# Altium PCB Placa_Sencilla.PcbDoc
Units mm, origin at the board's own origin, x right, y up, seen from the top; angles counter-clockwise.
Board outline 48 x 48 mm, 2 copper layers (Top Layer, Bottom Layer); 51 components, 48 nets, 205 pads, 0 vias.
Unrouted connection lines stored in the file: 141.
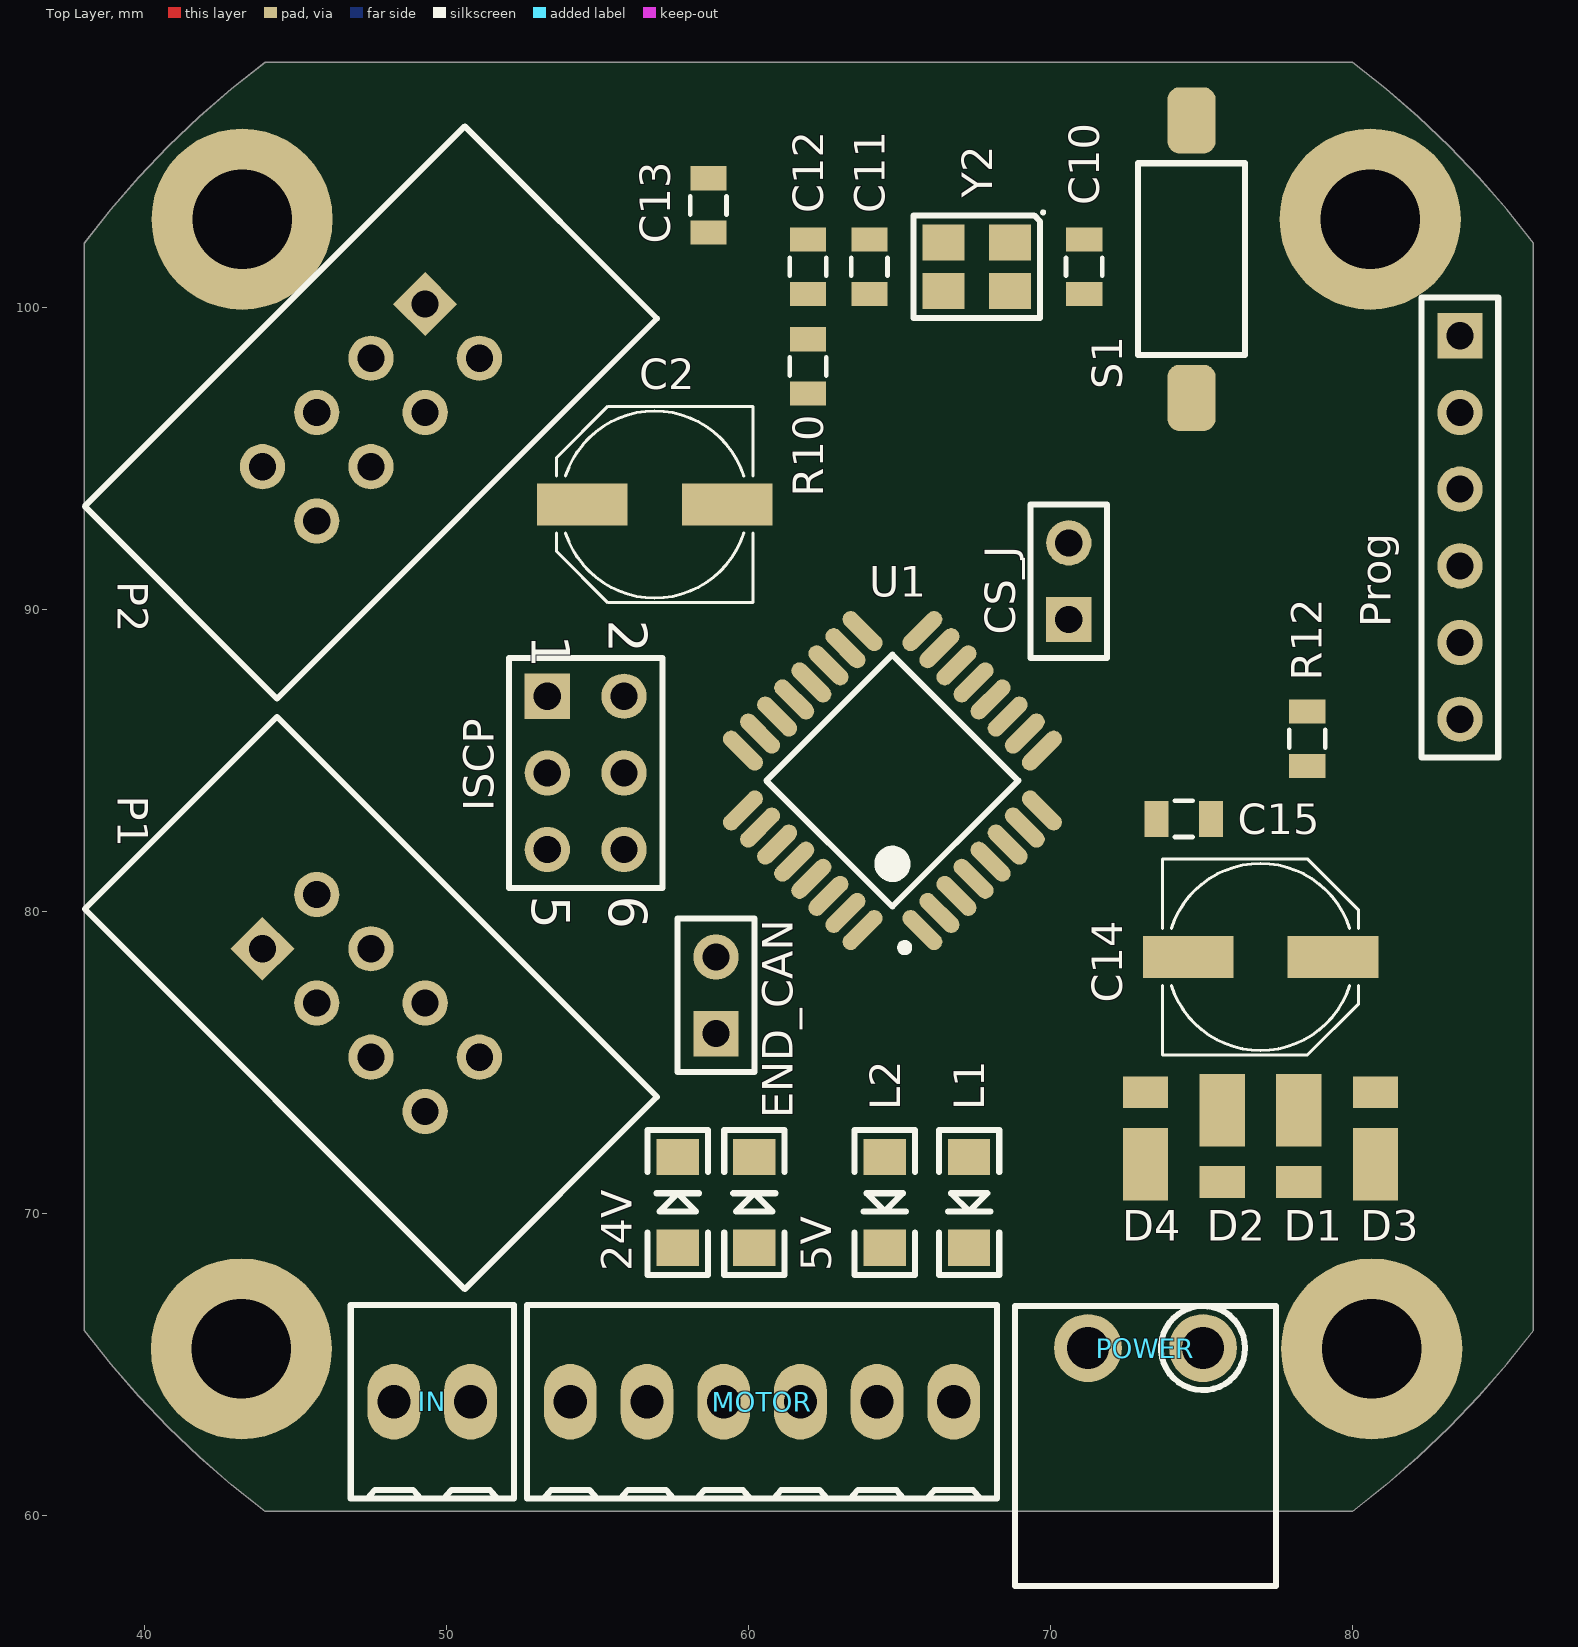
[diagram p0: Top Layer view]
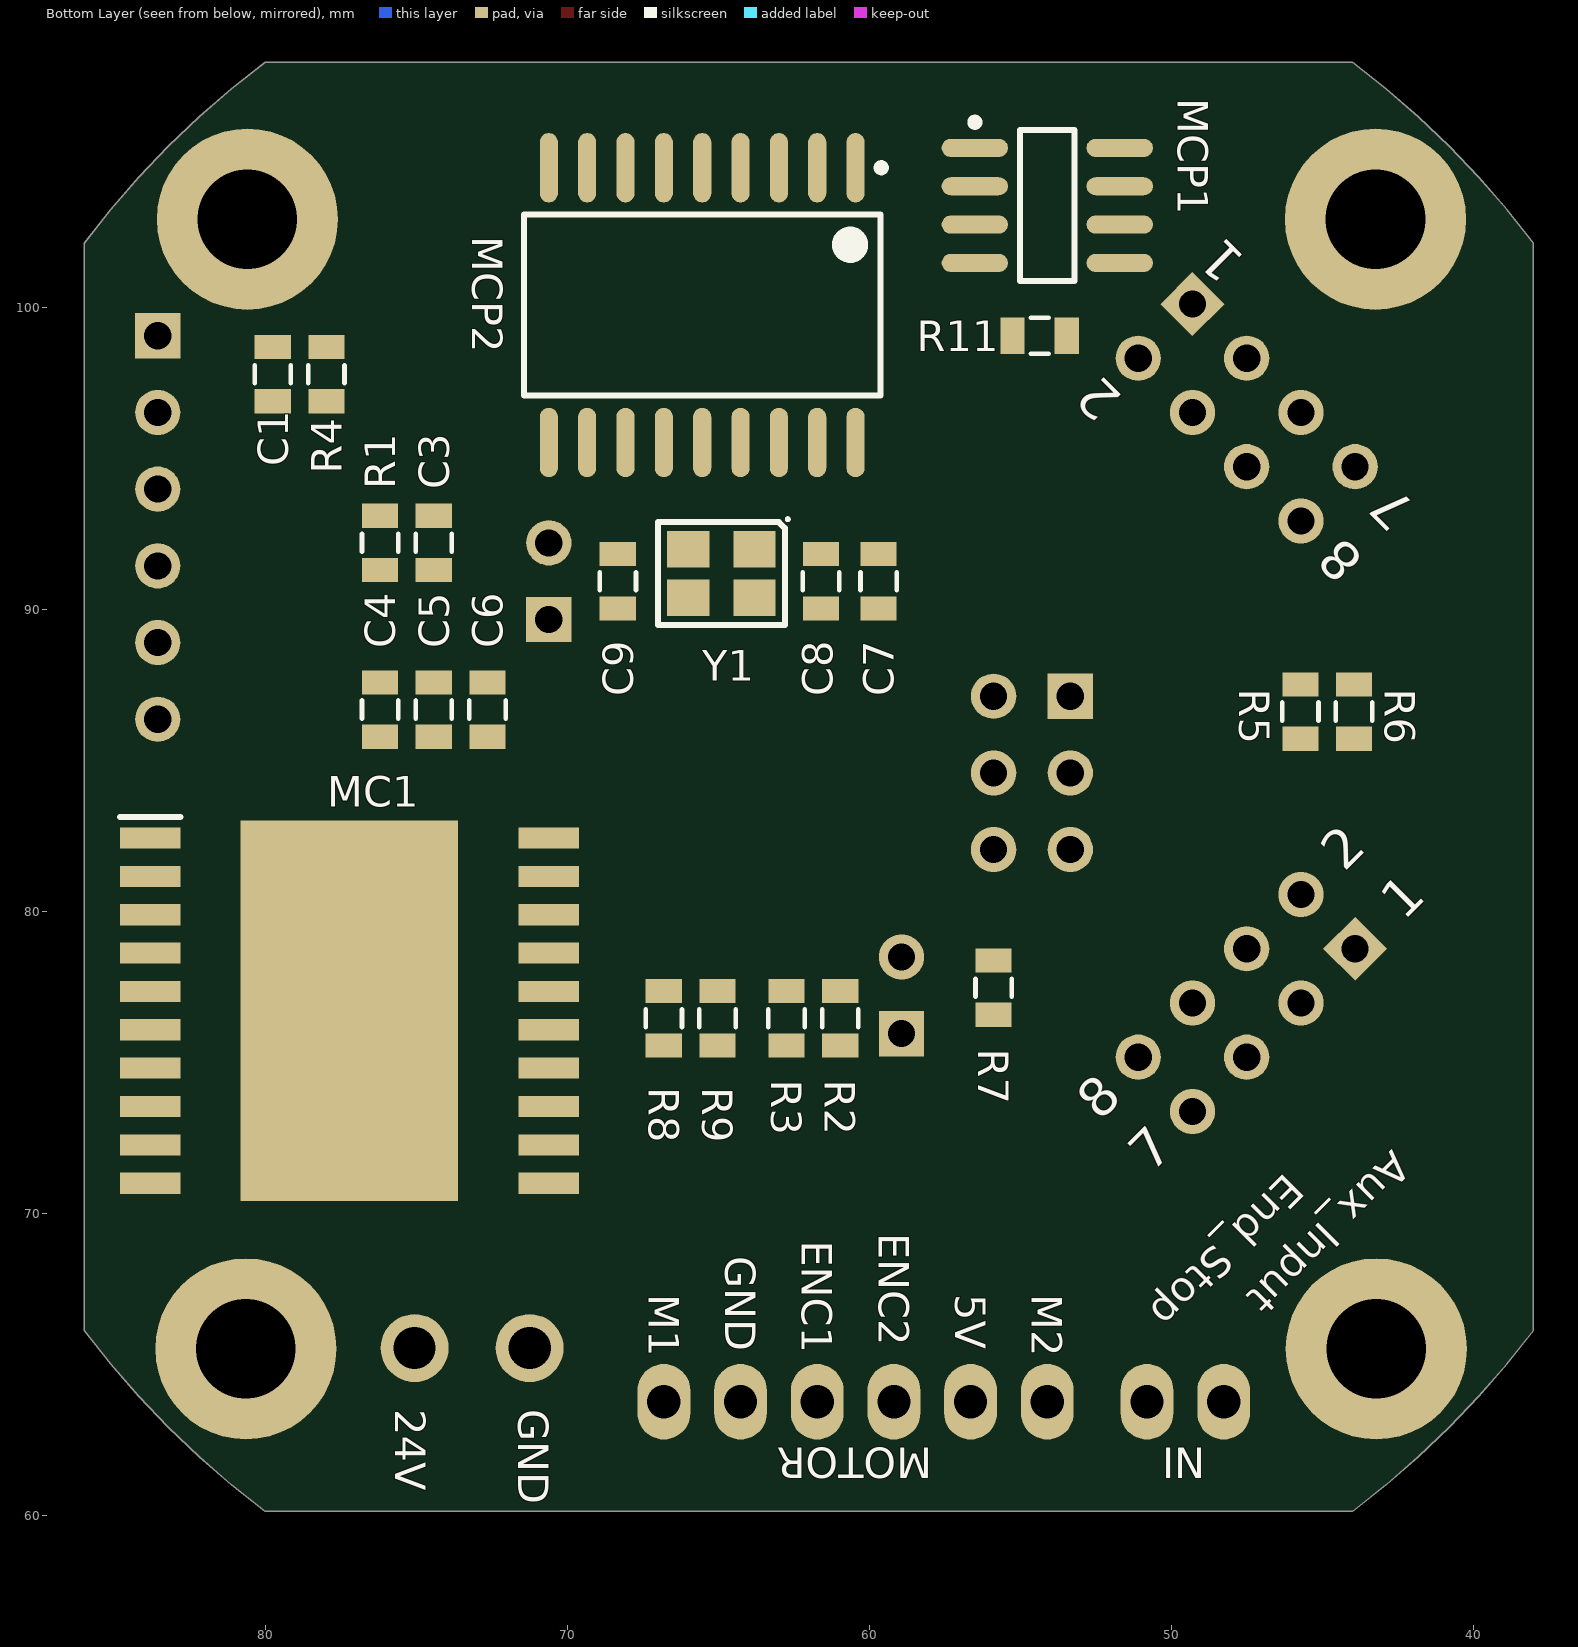
[diagram p1: Bottom Layer view, seen from below]

## Layer stack, top to bottom
Top Solder: solder mask 0.0102, Solder Resist, Dk 3.5
Top Layer: signal copper 0.0356
Dielectric 1: dielectric 0.32, FR-4, Dk 4.8
Bottom Layer: signal copper 0.0356
Bottom Solder: solder mask 0.0102, Solder Resist, Dk 3.5

## Board outline
40.788,62.908 39.809,63.934 38.88,65.004 38.001,66.119 38.001,102.125 38.88,103.239 39.809,104.309 40.788,105.335 41.813,106.313 42.884,107.243 43.998,108.122 80.004,108.122 81.118,107.243 82.189,106.313 83.214,105.335 84.192,104.309 85.122,103.239 86.001,102.125 86.001,66.119 85.122,65.004 84.192,63.934 83.214,62.908 82.189,61.93 81.118,61 80.004,60.122 43.998,60.122 42.884,61 41.813,61.93

## Design rules (kind name [scope] priority, off if disabled: settings)
BoardOutlineClearance [All] p1: gap=1 ignorepadtopadclearanceinfootprint=FALSE except(0: Arc-SplitContinuation Track-SplitContinuation SMDPad-SplitContinuation THPad-SplitContinuation Via-SplitContinuation Fill-SplitContinuation Poly-SplitContinuation Region-SplitContinuation Text-SplitContinuation)
Clearance Clearance_2 [InNamedPolygon('GND TOP PLANE')] p1: gap=0.254 ignorepadtopadclearanceinfootprint=FALSE except(0: Arc-Hole Track-Hole SMDPad-Hole THPad-Hole Via-Hole Fill-Hole Poly-Hole Region-Hole Text-Hole)
Clearance Clearance_1 [InNamedPolygon('GND BOTTOM PLANE')] p2: gap=0.254 ignorepadtopadclearanceinfootprint=FALSE except(0: Arc-Hole Track-Hole SMDPad-Hole THPad-Hole Via-Hole Fill-Hole Poly-Hole Region-Hole Text-Hole)
Clearance [All] p3: gap=0.152 ignorepadtopadclearanceinfootprint=FALSE
Clearance Clearance_POWER [InNet('24V') vs InNet('PGND')] p4: gap=0.381 ignorepadtopadclearanceinfootprint=FALSE
HoleSize [All] p1: absolutevalues=TRUE maxlimit=6.3 minlimit=0.3 maxpercent=80.000 minpercent=20.000
PlaneClearance [All] p1: clearance=5.016
PolygonConnect [All] p1: connectstyle=Relief reliefconductorwidth=0.254 reliefentries=4 polygonreliefangle="90 Angle" airgapwidth=0.254
RoomDefinition Placa_Motor_Esquematico [InComponentClass('Placa_Motor_Esquematico')] p1: confinementstyle=ConfineOut formatcopy=TRUE lockcomponents=FALSE outline 260.731,135.89 261.112,135.509 261.112,130.048 264.541,130.048 265.176,130.683 265.176,134.874 264.16,135.89 264.287,136.017 264.287,139.446
RoutingVias RoutingVias_24V [InNet('24V')] p1: holewidth=0.5 width=0.8 viastyle="Through Hole" minholewidth=0.3 minwidth=0.6 maxholewidth=1 maxwidth=1.2
RoutingVias RoutingVias_PGND [InNet('PGND')] p2: holewidth=0.4 width=0.7 viastyle="Through Hole" minholewidth=0.3 minwidth=0.6 maxholewidth=1 maxwidth=1.2
RoutingVias [All] p3: holewidth=0.3 width=0.5 viastyle="Through Hole" minholewidth=0.3 minwidth=0.6 maxholewidth=1 maxwidth=1.2
SMDNeckDown [All] p1: percent=100.000
SilkToSilkClearance [All] p1 off: silktosilkclearance=0.127
SolderMaskExpansion [All] p1: expansion=0.102
Width Width_Motor1 [InNet('MOTOR1')] p1: maxlimit=0.889 minlimit=0.381 preferedwidth=0.889
Width Width_Motor2 [InNet('MOTOR2')] p2: maxlimit=0.889 minlimit=0.381 preferedwidth=0.889
Width Width_24V [InNet('24V')] p3: maxlimit=0.889 minlimit=0.381 preferedwidth=0.889
Width Width_PGND [InNet('PGND')] p4: maxlimit=0.889 minlimit=0.381 preferedwidth=0.889
Width Width_VCC [InNet('VCC')] p5: maxlimit=0.508 minlimit=0.254 preferedwidth=0.508 checkconnectedcopper=TRUE
Width Width_GND [InNet('GND')] p6: maxlimit=0.508 minlimit=0.254 preferedwidth=0.508 checkconnectedcopper=TRUE
Width Width_5V [InNet('5V')] p7: maxlimit=0.381 minlimit=0.254 preferedwidth=0.381 checkconnectedcopper=TRUE
Width [All] p8: maxlimit=0.508 minlimit=0.254 preferedwidth=0.254
27 further rules are at their usual default settings.

## Components (designator, comment, footprint, x,y, rotation, side; value= is the part's Value field where it differs from the comment)
5V "1206 LED" LED-1206 60.198,70.358 r90 top
24V "1206 LED" LED-1206 57.658,70.358 r90 top
C1 "100n" 0805 79.756,97.79 r270 bottom
C2 "47uF" PANASONIC_D 56.896,93.472 r180 top
C3 "22p" 0805 74.422,92.202 r270 bottom
C4 "100n" 0805 76.2,86.679 r90 bottom
C5 "100n" 0805 74.422,86.679 r90 bottom
C6 "100n" 0805 72.644,86.679 r90 bottom
C7 "100n" 0805 59.69,90.932 r90 bottom
C8 "22p" 0805 61.595,90.932 r270 bottom
C9 "22p" 0805 68.326,90.932 r90 bottom
C10 "22p" 0805 71.12,101.346 r90 top
C11 "22p" 0805 64.008,101.346 r90 top
C12 "100n" 0805 61.976,101.346 r90 top
C13 "100n" 0805 58.674,103.378 r90 top
C14 "47uF" PANASONIC_D 76.962,78.486 r0 top
C15 "33n" 0805 74.422,83.058 r0 top
CS_J "Header 2" HDR1X2 70.612,89.662 r90 top
D1 "SBR3U40P1-7" POWERDI-123 78.232,71.882 r90 top
D2 "SBR3U40P1-7" POWERDI-123 75.692,71.882 r90 top
D3 "SBR3U40P1-7" POWERDI-123 80.772,73.152 r270 top
D4 "SBR3U40P1-7" POWERDI-123 73.152,73.152 r270 top
END_CAN "Header 2" HDR1X2 58.928,75.946 r90 top
IN "282834-2" "TE 282834-2" 49.53,63.754 r180 top
ISCP "Header 3X2" HDR2X3 53.34,87.122 r270 top
L1 "1206 LED" LED-1206 67.31,70.358 r270 top
L2 "1206 LED" LED-1206 64.516,70.358 r270 top
MC1 "MC33886PVW" SOIC127P1420X340-21N 77.216,76.708 r180 bottom
MCP1 "MCP2551T-I/SN" SOIC-SN8_N 54.102,103.378 r180 bottom
MCP2 "MCP2515T-E/SO" SOIC-SO18_N 65.532,100.076 r270 bottom
MOTOR "282834-6" "TE 282834-6" 60.452,63.754 r180 top
P1 "IDC2X4" IDC2X4 47.498,76.962 r315 top
P2 "IDC2X4" IDC2X4 47.498,96.52 r225 top
POWER "20020110-D021A01LF" "FCI 06-381-2PIN" 73.152,62.23 r180 top
Prog "Header 6" HDR1X6 83.566,99.06 r270 top
R1 "10K" 0805 76.2,92.202 r270 bottom
R2 "500" 0805 60.96,76.454 r90 bottom
R3 "5.2K" 0805 62.738,76.454 r90 bottom
R4 "10K" 0805 77.978,97.79 r90 bottom
R5 "0" 0805 45.72,86.614 r270 bottom
R6 "0" 0805 43.942,86.614 r270 bottom
R7 "124" 0805 55.88,77.47 r270 bottom
R8 "500" 0805 66.802,76.454 r90 bottom
R9 "500" 0805 65.024,76.454 r90 bottom
R10 "10K" 0805 61.976,98.044 r90 top
R11 "4.7K" 0805 54.356,99.06 r0 bottom
R12 "47k" 0805 78.511,85.714 r90 top
S1 "FSMSMTR" "TE FSMSMTR" 74.676,101.6 r180 top
U1 "ATmega328P-AU" 32A_N 64.77,84.328 r135 top
Y1 "16MHz" "NDK NX3225SA" 64.897,91.186 r0 bottom
Y2 "16MHz" "NDK NX3225SA" 67.564,101.346 r180 top

## Footprints (in the part's own frame and the unit in brackets; to place one, negate y for a bottom-side part, rotate by r counter-clockwise, add the part's x,y. Pads: shape width x height; smd on the part's side, far side on the other; paste and mask are expansions set on the pad)
32A_N [mm] "Thin QFP, 32-Leads, Body 7x7mm, Pitch 0.8mm, IPC Medium Density"
  oval 1.65x0.55 smd: 1(-4.2,2.8) 2(-4.2,2) 3(-4.2,1.2) 4(-4.2,0.4) 5(-4.2,-0.4) 6(-4.2,-1.2) 7(-4.2,-2) 8(-4.2,-2.8) 17(4.2,-2.8) 18(4.2,-2) 19(4.2,-1.2) 20(4.2,-0.4) 21(4.2,0.4) 22(4.2,1.2) 23(4.2,2) 24(4.2,2.8)
  oval 0.55x1.65 smd: 9(-2.8,-4.2) 10(-2,-4.2) 11(-1.2,-4.2) 12(-0.4,-4.2) 13(0.4,-4.2) 14(1.2,-4.2) 15(2,-4.2) 16(2.8,-4.2) 25(2.8,4.2) 26(2,4.2) 27(1.2,4.2) 28(0.4,4.2) 29(-0.4,4.2) 30(-1.2,4.2) 31(-2,4.2) 32(-2.8,4.2)
  silkscreen extent -4.32,-2.95 2.95,3.75, body extent -3.5,-3.5 3.5,3.5, height 1.2
0805 [mil]
  rect 31.5x47.24 smd: 1(-35.43,0) 2(35.43,0)
  silkscreen extent -12,-24 12,24, body extent -39,-25 39,25, height 20
"FCI 06-381-2PIN" [mm] "FCI Pluggable Terminal Block"
  round 2.25 hole 1.4: 1(-1.905,-3.302) 2(1.905,-3.302)
  silkscreen extent -4.32,-4.7 4.32,4.57, body extent -4.4,-4.7 4.4,4.5, height 7.6
HDR1X2 [mm] "Connector; Header; 2 Position"
  rect 1.5x1.5 hole 0.9: 1(0,0)
  round 1.5 hole 0.9: 2(2.54,0)
  silkscreen extent -1.27,-1.27 3.81,1.27
HDR1X6 [mm] "Connector; Header; 6 Position"
  rect 1.5x1.5 hole 0.9: 1(0,0)
  round 1.5 hole 0.9: 2(2.54,0) 3(5.08,0) 4(7.62,0) 5(10.16,0) 6(12.7,0)
  silkscreen extent -1.27,-1.27 13.97,1.27
HDR2X3 [mm] "Connector; Header; 3x2 Position"
  rect 1.5x1.5 hole 0.9: 1(0,0)
  round 1.5 hole 0.9: 2(0,2.54) 3(2.54,0) 4(2.54,2.54) 5(5.08,0) 6(5.08,2.54)
  silkscreen extent -1.27,-1.27 6.35,3.81
IDC2X4 [mm] "IDC Connector 2x4"
  rect 1.5x1.5 hole 0.9: 1(-3.81,-1.27)
  round 1.5 hole 0.9: 2(-3.81,1.27) 3(-1.27,-1.27) 4(-1.27,1.27) 5(1.27,-1.27) 6(1.27,1.27) 7(3.81,-1.27) 8(3.81,1.27)
  silkscreen extent -8.9,-4.5 8.9,4.5, body extent -8.89,-4.45 8.89,4.76, height 9.01
LED-1206 [mm]
  rect 1.2x1.4 smd: A(-1.5,0) C(1.5,0)
  silkscreen extent -2.4,-1 2.4,1, body extent -1.6,-0.8 1.6,0.8, height 1.11
"NDK NX3225SA" [mm] "Crystal, 4-Leads, Body 2.50x3.20mm, Pitch 2.20mm, IPC Medium Density"
  rect 1.4x1.2 smd: 1(-1.1,-0.8) 2(1.1,-0.8) 3(1.1,0.8) 4(-1.1,0.8)
  silkscreen extent -2.25,-1.85 2.1,1.7, body extent -1.61,-1.26 1.61,1.26, height 0.6
PANASONIC_D [mm]
  rect 3x1.4 smd: +(2.4,0) -(-2.4,0)
  silkscreen extent -3.25,-3.25 3.25,3.25, body extent -3.5,-3.3 3.5,3.3, height 5.4
POWERDI-123 [mm]
  rect 1.05x1.5 smd: A(-0.85,0)
  rect 2.4x1.5 smd: C(1.525,0)
  body extent -1.31,-0.97 2.59,0.96, height 1.01
SOIC127P1420X340-21N [mm]
  rect 2x0.7 smd: 1(-6.6,5.715) 2(-6.6,4.445) 3(-6.6,3.175) 4(-6.6,1.905) 5(-6.6,0.635) 6(-6.6,-0.635) 7(-6.6,-1.905) 8(-6.6,-3.175) 9(-6.6,-4.445) 10(-6.6,-5.715) 11(6.6,-5.715) 12(6.6,-4.445) 13(6.6,-3.175) 14(6.6,-1.905) 15(6.6,-0.635) 16(6.6,0.635) 17(6.6,1.905) 18(6.6,3.175) 19(6.6,4.445) 20(6.6,5.715)
  rect 7.2x12.6 smd: 21(0,0)
  silkscreen extent -7.6,6.42 -5.6,6.42, body extent -7.12,-8 7.13,8, height 3.21
SOIC-SN8_N [mm] "SOIC, 8-Leads, Body 4.9x3.8mm, Pitch 1.27mm, IPC Medium Density"
  oval 2.2x0.6 smd: 1(-2.4,1.905) 2(-2.4,0.635) 3(-2.4,-0.635) 4(-2.4,-1.905) 5(2.4,-1.905) 6(2.4,-0.635) 7(2.4,0.635) 8(2.4,1.905)
  silkscreen extent -2.53,-2.5 0.9,2.88, body extent -2,-2.5 2,2.5, height 1.75
SOIC-SO18_N [mm] "SOIC, 18-Leads, Body 11.5x7.5mm, Pitch 1.27mm, IPC Medium Density"
  oval 2.3x0.6 smd: 1(-4.55,5.08) 2(-4.55,3.81) 3(-4.55,2.54) 4(-4.55,1.27) 5(-4.55,0) 6(-4.55,-1.27) 7(-4.55,-2.54) 8(-4.55,-3.81) 9(-4.55,-5.08) 10(4.55,-5.08) 11(4.55,-3.81) 12(4.55,-2.54) 13(4.55,-1.27) 14(4.55,0) 15(4.55,1.27) 16(4.55,2.54) 17(4.55,3.81) 18(4.55,5.08)
  silkscreen extent -4.67,-5.9 3,6.05, body extent -3.8,-5.95 3.8,5.95, height 2.65
"TE 282834-2" [mm]
  oval 1.75x2.5 hole 1.1: 1(-1.27,0) 2(1.27,0)
  silkscreen extent -2.7,-3.2 2.7,3.2, body extent -2.77,-3.25 2.77,3.25, height 10
"TE 282834-6" [mm]
  oval 1.75x2.5 hole 1.1: 1(-6.35,0) 2(-3.81,0) 3(-1.27,0) 4(1.27,0) 5(3.81,0) 6(6.35,0)
  silkscreen extent -7.78,-3.2 7.78,3.2, body extent -7.85,-3.25 7.85,3.25, height 10
"TE FSMSMTR" [mm]
  rrect50% 1.6x2.19 smd: 1(0,4.595) 2(0,-4.595)
  silkscreen extent -1.78,-3.18 1.78,3.18, body extent -1.75,-4.98 1.75,4.98, height 4.42

## Part data
5V 24V L1 L2: library part LED1206
C1 C3 C4 C5 C6 C7 C8 C9 C10 C11 C12 C13 C15: library part CAP0805
C2 C14: library part 47UF-50V-20%(ELECT), PROD_ID=CAP-10547
CS_J END_CAN: "Header, 2-Pin", LatestRevisionDate=17-Jul-2002, LatestRevisionNote="Re-released for DXP Platform.", Publisher="Altium Limited"
D1 D2 D3 D4: library part DFLS1100-7
IN: "TERM BLOCK 2POS SIDE ENT 2.54MM", Colour=Green, Manufacturer="TE Connectivity AMP Connectors", Supplier Part Number 1=A98333-ND, TemperatureRange="-40C ~ 105C", Voltage=150V, ComponentLink1Description=Datasheet, ComponentLink1URL=http://www.te.com/commerce/DocumentDelivery/DDEController?Action=srchrtrv&DocNm=282834&DocType=Customer+Drawing&DocLang=English, ComponentLink2Description="Digi-Key Listing", ComponentLink2URL=http://www.digikey.ca/product-detail/en/282834-2/A98333-ND/1150135, Number Of Levels=1, Orientation="Horizontal with Board", PartId=9289, Part Number=282834-2, Pitch="0.100\" (2.54mm)", Positions Per Level=2, Price=1,3, Supplier 1=Digi-Key
ISCP: "Header, 3-Pin, Dual row", LatestRevisionDate=17-Jul-2002, LatestRevisionNote="Re-released for DXP Platform.", Publisher="Altium Limited"
MC1: "Motor / Motion / Ignition Controllers & Drivers 5.0 A H-BRIDGE", Manufacturer_Name=NXP, Arrow Part Number=MC33886PVW, Datasheet Link=https://www.nxp.com/docs/en/data-sheet/MC33886.pdf, Geometry.Height=3.4mm, Manufacturer_Part_Number=MC33886PVW
MCP1: "High-Speed CAN Transceiver, 8-Pin SOIC, Industrial Temperature, Tape and Reel", Supplier Part Number 1=MCP2551T-I/SNTR-ND, Code_IPC=SOIC127P600-8, Code_JEDEC=MS-012, ComponentLink1Description=Datasheet, ComponentLink1URL=http://ww1.microchip.com/downloads/en/DeviceDoc/21667E.pdf, ComponentLink2Description="Packaging Specification", ComponentLink2URL=http://www.microchip.com/stellent/groups/techpub_sg/documents/packagingspec/en012702.pdf, ComponentLink3Description="Microchip.com Home", ComponentLink3URL=http://www.microchip.com/, DatasheetVersion="revE, Jan-2007", PackageDescription="8-Lead Plastic Small Outline (SN) - Narrow, 3.90mm Body [SOIC]", PackageReference=SOIC-SN8, PackageVersion="revBB, Aug-2009", Published=29-Jan-2009, Publisher="Altium Limited", Supplier 1=Digi-Key, Supplier 2=Farnell, Supplier Part Number 2=1788569
MCP2: "Stand-Alone CAN Controller With SPI Interface, 18-Pin SOIC, Extended Temperature, Tape and Reel", Supplier Part Number 1=MCP2515T-E/SO-ND, Code_JEDEC=MS-013, ComponentLink1Description=Datasheet, ComponentLink1URL=http://ww1.microchip.com/downloads/en/DeviceDoc/21801e.pdf, ComponentLink2Description="Packaging Specification", ComponentLink2URL=http://www.microchip.com/stellent/groups/techpub_sg/documents/packagingspec/en012702.pdf, ComponentLink3Description="Microchip.com Home", ComponentLink3URL=http://www.microchip.com/, DatasheetVersion="revE, Nov-2007", PackageDescription="18-Lead Plastic Small Outline (SO) - Wide 7.50mm Body [SOIC]", PackageReference=SOIC-SO18, PackageVersion="revBB, Aug-2009", Published=29-Jan-2009, Publisher="Altium Limited", Supplier 1=Digi-Key
MOTOR: "TERM BLOCK 6POS SIDE ENT 2.54MM", Colour=Green, Manufacturer="TE Connectivity AMP Connectors", Supplier Part Number 1=A98337-ND, TemperatureRange="-40C ~ 105C", Voltage=150V, ComponentLink1Description=Datasheet, ComponentLink1URL=http://www.te.com/commerce/DocumentDelivery/DDEController?Action=srchrtrv&DocNm=282834&DocType=Customer+Drawing&DocLang=English, ComponentLink2Description="Digi-Key Listing", ComponentLink2URL=http://www.digikey.ca/product-detail/en/282834-6/A98337-ND/1153267, Number Of Levels=1, Orientation="Horizontal with Board", PartId=9293, Part Number=282834-6, Pitch="0.100\" (2.54mm)", Positions Per Level=6, Price=4,82, Supplier 1=Digi-Key
P1 P2: "Header, 4-Pin, Dual row", LatestRevisionDate=17-Jul-2002, LatestRevisionNote="Re-released for DXP Platform.", Publisher="Altium Limited"
POWER: "TERM BLOCK HDR 2POS R/A 3.81MM", Colour=Green, Manufacturer=FCI, Supplier Part Number 1=609-3819-ND, TemperatureRange="-40C ~ 115C", Voltage=300V, ComponentLink1Description=Datasheet, ComponentLink1URL=http://portal.fciconnect.com/Comergent//fci/drawing/20020110.pdf, ComponentLink2Description="Digi-Key Listing", ComponentLink2URL=http://www.digikey.ca/product-detail/en/20020110-D021A01LF/609-3819-ND/2261255, Number Of Levels=1, Number Of Positions=2, Orientation="90, Right Angle", PartId=7785, Part Number=20020110-D021A01LF, Pitch="0.150\" (3.81mm)", Positions Per Level=2, Price=0,75, Supplier 1=Digi-Key, Type="Through Hole"
Prog: "Header, 6-Pin", LatestRevisionDate=17-Jul-2002, LatestRevisionNote="Re-released for DXP Platform.", Publisher="Altium Limited"
R1 R2 R3 R4 R5 R6 R7 R8 R9 R10 R11 R12: library part RESISTOR0805-RES
S1: "SWITCH TACTILE SPST-NO 0.05A 24V", Contact Rating @ Voltage="0.05A @ 24VDC", Illumination Type, Colour=-, Manufacturer="TE Connectivity Alcoswitch Switches", Operating Force=180gf, Operating Temperature="-35C ~ 85C", Supplier Part Number 1=450-1758-2-ND, Actuator Orientation="Top Actuated", Actuator Type=Standard, Circuit=SPST-NO, ComponentLink1Description=Datasheet, ComponentLink1URL=http://www.te.com/commerce/DocumentDelivery/DDEController?Action=srchrtrv&DocNm=1437566-3&DocType=Customer+Drawing&DocLang=English, ComponentLink2Description="Digi-Key Listing", ComponentLink2URL=http://www.digikey.com/product-detail/en/FSMSMTR/450-1758-2-ND/529671, Illumination=Non-Illuminated, Illumination Voltage=-, Mechanical Life="20,000 Cycles", PartId=8251, Part Number=FSMSMTR, Price=0,175, Supplier 1=Digi-Key, Switch Function=Off-Mom, Switch Travel=0.25mm
U1: "8-bit AVR Microcontroller, 32KB Flash, 1KB EEPROM, 2KB SRAM, 32-pin TQFP, Industrial Grade (-40°C to 85°C)", Supplier Part Number 1=ATMEGA328P-AU-ND, Code_JEDEC=MS-026-ABA, ComponentLink1Description="Manufacturer Link", ComponentLink1URL=http://www.atmel.com/products/avr/default.asp?, ComponentLink2Description="ATmega48A/48PA/88A/88PA/168A/168PA/328/328P Datasheet", ComponentLink2URL=http://www.atmel.com/dyn/resources/prod_documents/8271.pdf, ComponentLink3Description="ATmega48A/48PA/88A/88PA/168A/168PA/328/328P Summary", ComponentLink3URL=http://www.atmel.com/dyn/resources/prod_documents/8271S.pdf, ComponentLink4Description="Atmel.com Home", ComponentLink4URL=http://www.atmel.com, DatasheetVersion="revA, Jan-2010", PackageDescription="32-Lead, 7x7x1.0 mm Body, 0.8mm Lead Pitch, Thin Profile Plastic Quad Flat Package (TQFP)", PackageReference=32A, PackageVersion="revB, Oct-2001", Published=1-Apr-2010, Publisher="Altium Limited", Supplier 1=Digi-Key, Supplier 2=Farnell, Supplier 3=Mouser, Supplier Part Number 2=1715486, Supplier Part Number 3=556-ATMEGA328P-AU
Y1 Y2: library part NX3225SA-16.000MHZ-STD-CSR-1, "CRYSTAL 16.0000MHZ 8PF SMD", Device Package="4-SMD, No Lead (DFN, LCC)", Frequency Stability=15ppm, Load Capacitance=8pF, Manufacturer=NDK, Operating Mode=Fundamental, Supplier Part Number 1=644-1049-2-ND, ComponentLink1Description=Datasheet, ComponentLink1URL=http://media.digikey.com/pdf/Data%20Sheets/NDK%20PDFs/NX3225SA.pdf, ComponentLink2Description="Digi-Key Listing", ComponentLink2URL=http://www.digikey.com/product-detail/en/NX3225SA-16.000MHZ-STD-CSR-1/644-1049-2-ND/1128831, ESR="80 Ohm", Frequency=16MHz, Frequency Tolerance=15ppm, PartId=8509, Part Number=NX3225SA-16.000MHZ-STD-CSR-1, Price=0,3799, Supplier 1=Digi-Key, Type="MHz Crystal"

## Free pads (board coordinates)
  round 6 hole 3.3: 2(43.205,65.507) 3(43.231,102.921) 3(80.594,102.921) 3(80.645,65.507)

## Nets (pads, with @x,y where several pads share a name; then routed paths per layer and width w, separated by ;. In a path a pad name is that pad's centre, name@x,y a point inside that pad or via, vN(x,y) a via of type N, cw(c..) or ccw(c..) an arc to the next point about the centre after c; other vN are vias at no path point)
5V: C2.+ C4.1 C5.1 C6.1 C12.1 C13.1 ISCP.2 MCP1.3 MCP2.18 MOTOR.5 P1.1 P2.1 Prog.1 R1.2 R2.2 R4.1 R5.2 R6.2 R10.2 R12.2 U1.4 U1.6 U1.18
24V: C14.+ D3.C D4.C MC1.4 MC1.5 MC1.16 POWER.1 R3.2
AREF: C7.1 U1.20
Aux_Input: IN.2 U1.25
C_CS: CS_J.1 U1.14
CANH: MCP1.7 P1.5 P2.5 R7.1
CANL: END_CAN.2 MCP1.6 P1.6 P2.6
CTAL1: C10.1 MCP2.8 Y2.1
CTAL2: C11.1 MCP2.7 Y2.3
D1: MC1.18 U1.2
D2: MC1.13 U1.11
DRIVER1: MC1.3 U1.9
DRIVER2: MC1.19 U1.10
ENC1: MOTOR.3 U1.32
ENC2: MOTOR.4 U1.1
End_Stop: IN.1 U1.24
FB: MC1.8 U1.22
FS: MC1.2 R12.1 U1.19
GND: 5V.C 24V.C C2.- C3.2 C4.2 C5.2 C6.2 C7.2 C8.2 C9.2 C10.2 C11.2 C12.2 C13.2 ISCP.6 L1.C L2.C MC1.1 MCP1.2 MCP2.9 MOTOR.2 P1.2 P2.2 Prog.2 R11.1 S1.2 U1.3 U1.5 U1.21 Y1.2 Y1.4 Y2.2 Y2.4
INT: MCP2.12 U1.13
LED1: R8.2 U1.12
LED2: R9.2 U1.26
MISO: ISCP.1 MCP2.15 U1.16
MOSI: ISCP.4 MCP2.14 U1.15
MOTOR1: D1.C D3.A MC1.6 MC1.7 MOTOR.1
MOTOR2: D2.C D4.A MC1.14 MC1.15 MOTOR.6
Net5V_A: 5V.A R2.1
Net24V_A: 24V.A R3.1
NetC1_2: C1.2 Prog.5
NetC15_1: C15.1 MC1.17
NetCS_J_2: CS_J.2 MCP2.16
NetEND_CAN_1: END_CAN.1 R7.2
NetL1_A: L1.A R8.1
NetL2_A: L2.A R9.1
NetMCP1_1: MCP1.1 MCP2.1
NetMCP1_4: MCP1.4 MCP2.2
NetMCP1_8: MCP1.8 R11.2
NetMCP2_17: MCP2.17 R10.1
PGND: C14.- C15.2 D1.A D2.A MC1.9 MC1.10 MC1.11 MC1.12 POWER.2
RESET: C1.1 C3.1 ISCP.5 R1.1 R4.2 S1.1 U1.29
RXP: Prog.4 U1.31
SCK: ISCP.3 MCP2.13 U1.17
SCL: P1.3 P2.3 R5.1 U1.28
SDA: P1.4 P2.4 R6.1 U1.27
SOS: P1.8 P2.8 U1.23
TXP: Prog.3 U1.30
XTAL1: C8.1 U1.7 Y1.1
XTAL2: C9.1 U1.8 Y1.3
pads on no net: MC1.20 MC1.21 MCP1.5 MCP2.3 MCP2.4 MCP2.5 MCP2.6 MCP2.10 MCP2.11 P1.7 P2.7 Prog.6

## Silkscreen, mask and mechanical layers (free items; w line width, h text height)
Bottom Overlay:
  text "Aux_Input" at 42.672,72.136 h1 r135
  text "End_Stop" at 46.228,71.374 h1 r135
  text "ENC2" at 59.69,69.342 h1 r90
  text "ENC1" at 62.23,69.088 h1 r90
  text "GND" at 64.77,68.58 h1 r90
  text "M2" at 54.61,67.31 h1 r90
  text "5V" at 57.15,67.31 h1 r90
  text "M1" at 67.31,67.31 h1 r90
  text "GND" at 71.628,63.5 h1 r90
  text "24V" at 75.692,63.5 h1 r90
Mechanical 2:
  the board outline again, w0.2

## Text inside footprints (layer, text, board x,y; h text height)
ISCP: Top Overlay "1" at 52.832,89.154 h1.27 r270; Top Overlay "2" at 55.372,89.662 h1.27 r270; Top Overlay "5" at 52.832,80.518 h1.27 r270; Top Overlay "6" at 55.372,80.518 h1.27 r270
P1: Bottom Overlay "8" at 52.347,73.011 h1.27 r315; Bottom Overlay "7" at 50.641,71.304 h1.27 r315; Bottom Overlay "2" at 44.265,81.273 h1.27 r315; Bottom Overlay "1" at 42.289,79.656 h1.27 r315
P2: Bottom Overlay "8" at 43.547,91.671 h1.27 r225; Bottom Overlay "7" at 41.84,93.377 h1.27 r225; Bottom Overlay "2" at 51.562,97.028 h1.27 r225; Bottom Overlay "1" at 47.498,101.6 h1.27 r225